# Altium PCB Notecarier-F.PcbDoc (part 3 of 3)
Units mm, origin at the board's own origin, x right, y up, seen from the top; angles counter-clockwise.
Board outline 50.8 x 103 mm, 4 copper layers (Top Layer, Mid Layer 3, Mid Layer 4, Bottom Layer), stack 1.58 mm thick; 105 components, 115 nets, 561 pads, 506 vias.
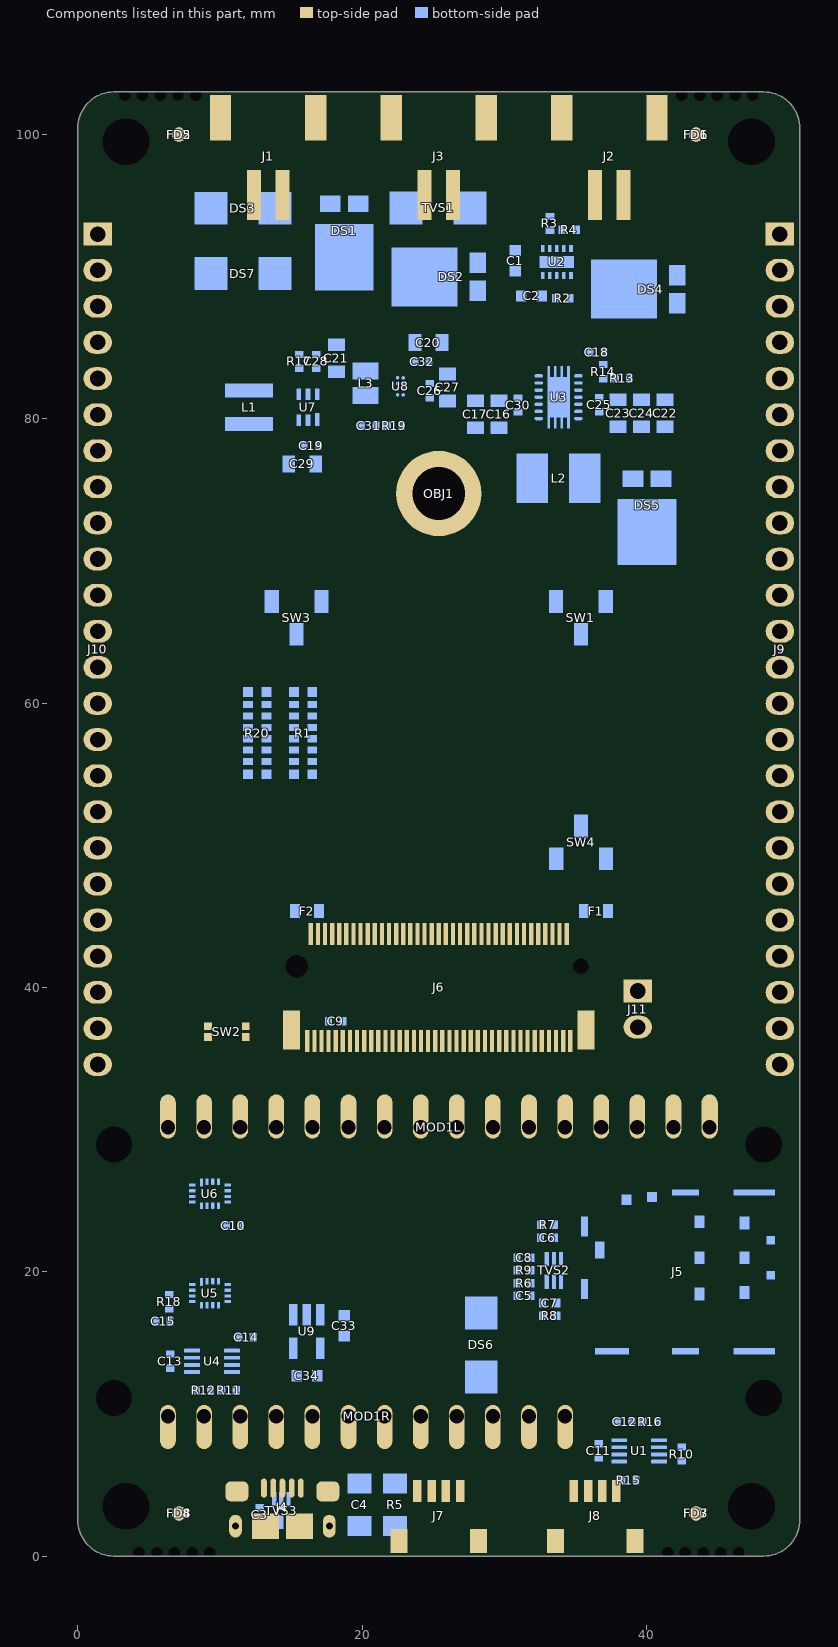
[diagram p5: the components of this part, seen from the top]

## Silkscreen, mask and mechanical layers (free items; w line width, h text height) (continued)
M17 Sheet Bot:
  drawing of 42 lines, arcs and shapes, not listed
  text "4" at -45.09,131.386 h1.78
  text "3" at 27.808,131.386 h1.78
  text "2" at 100.96,131.386 h1.78
  text "1" at 173.604,131.386 h1.78
  text "This document is the exclusive property of Byte Lab Grupa d.o.o. Company and it should not be distributed or" at 202.988,126.433 h1.52
  text "reproduced into any other format without prior permission from Byte Lab Grupa d.o.o." at 202.607,123.004 h1.52
  text "A" at -79.075,108.374 h1.78
  text "A" at 207.945,108.374 h1.78
  text "B" at -79.075,60.317 h1.78
  text "B" at 207.945,60.317 h1.78
  text "C" at -79.075,11.803 h1.78
  text "C" at 207.945,11.803 h1.78
  text "SIGNATURE" at 22.125,-25.025 h1.14
  text "TITLE:" at -2.245,-25.215 h1.14
  text "AUTHOR:" at 36.125,-29.107 h1.14
  text ".PCB_Author" at 22.125,-29.168 h1.52
  text ".PCB_Acceptor" at 22.125,-34.057 h1.52
  text "ACCEPTOR:" at 36.125,-34.057 h1.14
  text "D" at -79.075,-36.203 h1.78
  text "D" at 207.945,-36.203 h1.78
  text "BOM NO.:" at -2.245,-40.455 h1.14
  text "Byte Lab Grupa d.o.o." at 62.275,-43.695 h1.65
  text "Medarska 69/1" at 62.275,-46.235 h1.65
  text "FORMAT:" at -55.585,-48.075 h1.14
  text "10000 Zagreb" at 62.275,-48.775 h1.65
  text "DESIGN DOCUMENT / NAME:" at 35.982,-49.702 h1.14
  text "'.HW_E_Doc_Num' '.Module_Name' Rev. '.HW_E_Doc_Rev'" at 19.125,-50.025 h1.52
  text "A4" at -64.125,-50.275 h1.52
  text "Croatia" at 62.275,-51.315 h1.65
  text "4" at -45.09,-56.574 h1.78
  text "3" at 27.808,-56.574 h1.78
  text "2" at 100.96,-56.574 h1.78
  text "1" at 173.604,-56.574 h1.78
M24 Assy Top Des:
  text "Assembly drawing designators - TOP" at 143.75,-29.685 h1.52
  text "BOM NO.:" at 129.87,-40.43 h1.14
  text ".PCBA_BOM_Num" at 143.25,-41.535 h1.52
M25 Assy Bot Des:
  text "Assembly drawing designators - BOTTOM" at -16.125,-29.775 h1.52
  text ".PCBA_BOM_Num" at -15.625,-41.525 h1.52

## Dimensions
47.4,3.5 to 47.4,99.5 on M3 Dimensions
3.4,3.5 to 47.4,3.5 on M3 Dimensions
48.26,0 to 48.26,103 on M3 Dimensions
0,2.54 to 50.8,2.54 on M3 Dimensions

## Text inside footprints (layer, text, board x,y; h text height)
DS1: M19 Sheet Bot Panel "3" at 18.75,91.295 h0.2 r180; M19 Sheet Bot Panel "1" at 19.735,95.045 h0.2 r90; M19 Sheet Bot Panel "2" at 17.765,95.045 h0.2 r90
DS2: M19 Sheet Bot Panel "3" at 24.32,90 h0.2 r90; M19 Sheet Bot Panel "1" at 28.07,89.015 h0.2; M19 Sheet Bot Panel "2" at 28.07,90.985 h0.2
DS4: M19 Sheet Bot Panel "3" at 38.345,89.125 h0.2 r90; M19 Sheet Bot Panel "1" at 42.095,88.14 h0.2; M19 Sheet Bot Panel "2" at 42.095,90.11 h0.2
DS5: M19 Sheet Bot Panel "3" at 40.05,71.97 h0.2 r180; M19 Sheet Bot Panel "1" at 41.035,75.72 h0.2 r90; M19 Sheet Bot Panel "2" at 39.065,75.72 h0.2 r90
J5: M2 Components Bot "EDGE" at 49.325,14.2 h1 r90; M2 Components Bot "EDGE" at 49.325,29.23 h1 r90; M2 Components Bot "Only GND Trace" at 38.793,16.343 h0.3 r180
OBJ1: M19 Sheet Bot Panel "1" at 25.4,74.67 h0.2